# EAGLE board mbhp_dio_matrix (EAGLE 6.2)
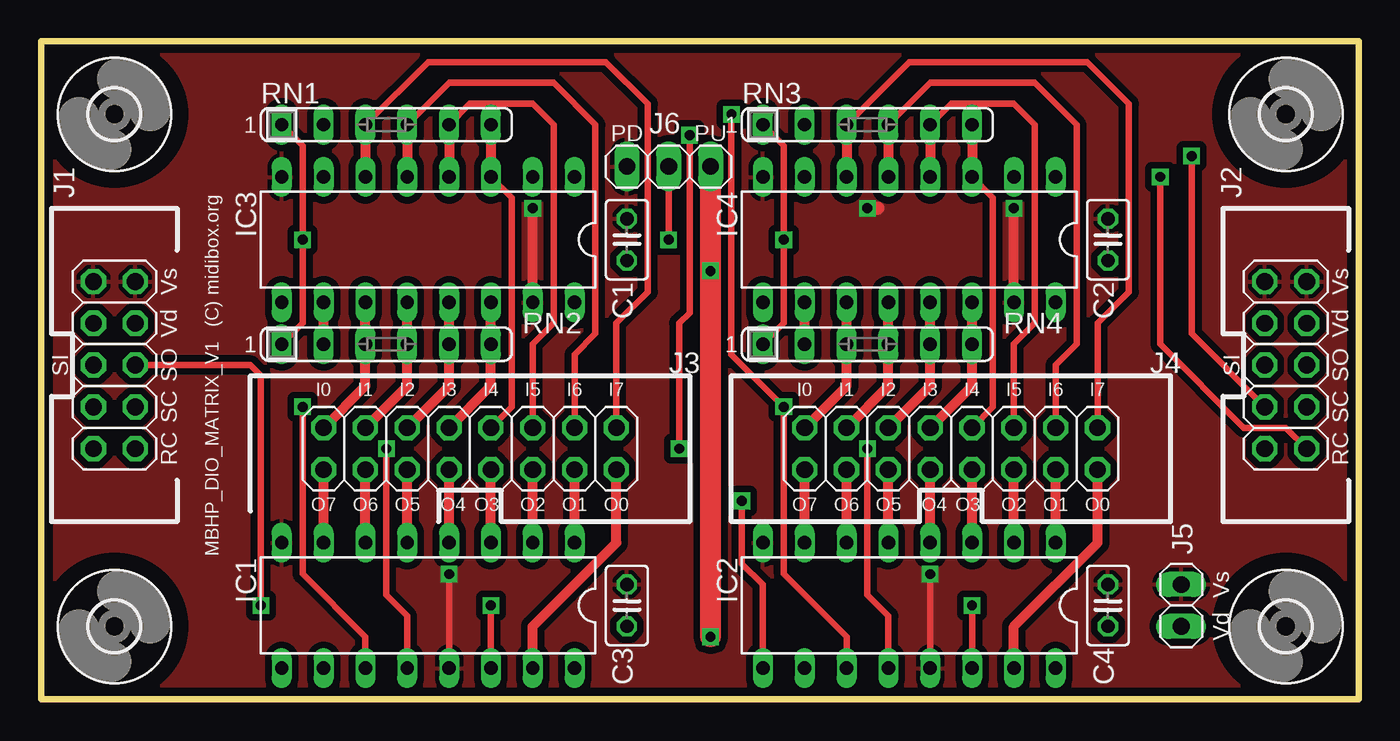
[diagram p0: board, top side]
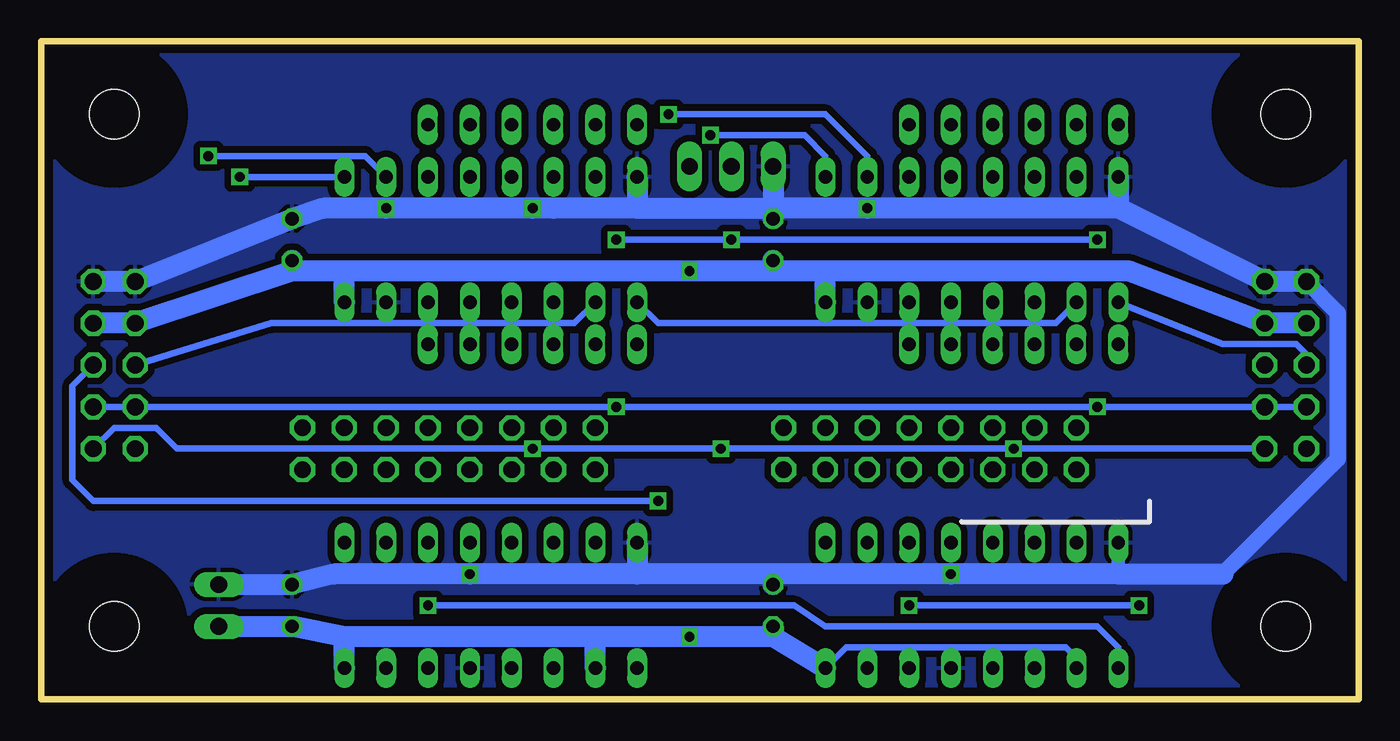
[diagram p1: board, bottom side, seen from below]

Size 80 x 40 mm. Coordinates in mm from the lower left corner, seen from the top.
Outline: 0,0 0,40 80,40 80,0 0,0
Copper layers (1*16): Top 0.035mm / dielectric 1.5mm / Bottom 0.035mm
Design rules: minimum track width 8mil, minimum drill 0.6mm, track to track 8mil, track to pad 8mil, pad to pad 8mil, via to via 8mil, smd to smd 0mil, copper to edge 20mil, drill to drill 10mil, minimum pad ring 8mil, minimum via ring 8mil, stop-mask expansion 0mil, vias tented up to drill 0mil, thermal gap 10mil

## Footprints (pad centres in the part's own frame; a part is rotated, then mirrored left to right if it is on the bottom)
C025-025X050 = drill 0.813 octagon: 1 -1.27,0; 2 1.27,0
3,0 = hole 3: 0,0
DIL16 = drill 0.813 long: 1 -8.89,-3.81; 2 -6.35,-3.81; 3 -3.81,-3.81; 4 -1.27,-3.81; 5 1.27,-3.81; 6 3.81,-3.81; 7 6.35,-3.81; 8 8.89,-3.81; 9 8.89,3.81; 10 6.35,3.81; 11 3.81,3.81; 12 1.27,3.81; 13 -1.27,3.81; 14 -3.81,3.81; 15 -6.35,3.81; 16 -8.89,3.81
2X05 = drill 1.016 octagon: 1 -5.08,-1.27; 2 -5.08,1.27; 3 -2.54,-1.27; 4 -2.54,1.27; 5 0,-1.27; 6 0,1.27; 7 2.54,-1.27; 8 2.54,1.27; 9 5.08,-1.27; 10 5.08,1.27
2X08 = drill 1.016 octagon: 1 -8.89,-1.27; 2 -8.89,1.27; 3 -6.35,-1.27; 4 -6.35,1.27; 5 -3.81,-1.27; 6 -3.81,1.27; 7 -1.27,-1.27; 8 -1.27,1.27; 9 1.27,-1.27; 10 1.27,1.27; 11 3.81,-1.27; 12 3.81,1.27; 13 6.35,-1.27; 14 6.35,1.27; 15 8.89,-1.27; 16 8.89,1.27
1X02 = drill 1.016 long: 1 -1.27,0; 2 1.27,0
1X03 = drill 1.016 long: 1 -2.54,0; 2 0,0; 3 2.54,0
SIL6 = drill 0.813 long: 1 -6.35,0; 2 -3.81,0; 3 -1.27,0; 4 1.27,0; 5 3.81,0; 6 6.35,0

## Placement (x,y rotation side)
C1  100nF  [C025-025X050]  35.56,27.94 90 top
C2  100nF  [C025-025X050]  64.77,27.94 90 top
C3  100nF  [C025-025X050]  35.56,5.71 90 top
C4  100nF  [C025-025X050]  64.77,5.71 90 top
E$1  [3,0]  4.45,35.56 0 top
E$2  [3,0]  75.56,35.56 0 top
E$3  [3,0]  75.56,4.45 0 top
E$4  [3,0]  4.45,4.45 0 top
IC1  74HC595  [DIL16]  23.5,5.71 180 top
IC2  74HC595  [DIL16]  52.7,5.71 180 top
IC3  74HC165  [DIL16]  23.5,27.94 180 top
IC4  74HC165  [DIL16]  52.7,27.94 180 top
J1  [2X05]  4.45,20.32 270 top
J2  [2X05]  75.56,20.32 270 top
J3  [2X08]  26.04,15.24 0 top
J4  [2X08]  55.24,15.24 0 top
J5  [1X02]  69.22,5.71 90 top
J6  [1X03]  38.1,32.38 180 top
RN1  5x10k  [SIL6]  20.95,34.92 0 top
RN2  5x10k  [SIL6]  20.95,21.59 0 top
RN3  5x10k  [SIL6]  50.16,34.92 0 top
RN4  5x10k  [SIL6]  50.16,21.59 0 top

## Library data of the parts
C1-C4 = resistor
E$1-E$4 = holes
IC1-IC4 = 74xx-eu
J1-J6 = pinhead
RN1-RN4 = resistor-sil

## Nets
GND: C1.2 C2.2 C3.2 C4.2 IC1.8 IC1.13 IC2.8 IC2.13 IC3.8 IC3.15 IC4.8 IC4.15 J1.1 J1.2 J2.1 J2.2 J5.2 J6.3
RC: IC1.12 IC2.12 IC3.1 IC4.1 J1.10 J2.10
S$1: J6.2 RN1.1 RN2.1 RN3.1 RN4.1
S$2: IC1.9 IC2.14
S$3: IC3.11 J3.2 RN2.3
S$4: IC3.12 J3.4 RN2.4
S$5: IC3.13 J3.6 RN2.5
S$6: IC3.14 J3.8 RN2.6
S$7: IC3.3 J3.10 RN1.6
S$8: IC3.4 J3.12 RN1.5
S$9: IC3.5 J3.14 RN1.4
S$10: IC3.6 J3.16 RN1.3
S$11: IC4.11 J4.2 RN4.3
S$12: IC4.12 J4.4 RN4.4
S$13: IC4.13 J4.6 RN4.5
S$14: IC4.14 J4.8 RN4.6
S$15: IC4.3 J4.10 RN3.6
S$16: IC4.4 J4.12 RN3.5
S$17: IC4.5 J4.14 RN3.4
S$18: IC4.6 J4.16 RN3.3
S$19: IC3.10 IC4.9 RN2.2
S$20: IC4.10 J2.5 RN4.2
S$24: IC1.7 J3.1
S$25: IC1.6 J3.3
S$26: IC1.5 J3.5
S$27: IC1.4 J3.7
S$28: IC1.3 J3.9
S$29: IC1.2 J3.11
S$30: IC1.1 J3.13
S$31: IC1.15 J3.15
S$32: IC2.7 J4.1
S$33: IC2.6 J4.3
S$34: IC2.5 J4.5
S$35: IC2.4 J4.7
S$36: IC2.3 J4.9
S$37: IC2.2 J4.11
S$38: IC2.1 J4.13
S$39: IC2.15 J4.15
S$42: IC2.9 J2.6
SC: IC1.11 IC2.11 IC3.2 IC4.2 J1.7 J1.8 J2.7 J2.8
SI: IC3.9 J1.5
SO: IC1.14 J1.6
VDD: C1.1 C2.1 C3.1 C4.1 IC1.10 IC1.16 IC2.10 IC2.16 IC3.16 IC4.16 J1.3 J1.4 J2.3 J2.4 J5.1 J6.1

## Tracks (layer width: path | path; a pad name or v marks a point on that pad's centre or on a via)
GND  (via drill 0.6)
  Top 0.406: IC1.13 v24.77,7.62 | IC2.13 v53.98,7.62
  Top 0.61: IC3.15 v29.84,29.84 | IC4.15 v59.05,29.84
  Top 0.813: v50.16,29.84 50.8,29.84
  Bottom 0.813: IC1.8 14.61,7.62
  Bottom 1.016: J1.1 1.27,23.5 1.27,14.61 8.26,7.62
  Bottom 1.27: J1.1 J1.2 14.61,29.84 | IC3.8 14.61,29.84 | 14.61,29.84 v29.84,29.84 35.56,29.84 | J2.2 J2.1 C2.2 62.87,29.84 v59.05,29.84 v50.16,29.84 48.9,29.84 43.81,29.84 | J6.3 C1.2 35.56,29.84 | 43.81,29.84 35.56,29.84 | 35.56,7.62 v24.77,7.62 14.61,7.62 8.26,7.62 | C3.2 35.56,7.62 | 35.56,7.62 43.81,7.62 | IC2.8 43.81,7.62 | 43.81,7.62 v53.98,7.62 62.23,7.62 C4.2 J5.2 | IC4.8 43.81,29.84
  pour Top (isolate 0.406): 0,40 80,40 80,0 0,0
  pour Bottom (isolate 0.406): 0,40 80,40 80,0 0,0
RC  (via drill 0.6)
  Top 0.406: IC1.12 22.23,5.08 20.95,6.35 v20.95,15.24 | IC2.12 51.44,5.08 50.16,6.35 v50.16,15.24 | v39.37,34.29 39.37,23.5 38.73,22.86 v38.73,15.24 | v67.94,31.75 67.94,21.59 73.03,16.51 75.56,16.51 J2.10
  Bottom 0.406: J1.10 v20.95,15.24 v38.73,15.24 v50.16,15.24 71.75,15.24 73.03,16.51 75.56,16.51 J2.10 | IC3.1 32.38,33.02 33.66,34.29 v39.37,34.29 | IC4.1 v67.94,31.75
S$1  (via drill 0.6)
  Top 0.406: RN1.1 15.88,33.66 v15.88,27.94 15.88,22.86 RN2.1 | RN4.1 45.09,22.86 v45.09,27.94 45.09,33.66 RN3.1 | v38.1,27.94 J6.2
  Bottom 0.406: v15.88,27.94 v38.1,27.94 v45.09,27.94
S$2  (via drill 0.6)
  Top 0.406: v56.52,5.71 IC2.14
  Bottom 0.406: v56.52,5.71 34.29,5.71 32.38,4.45 15.88,4.45 14.61,3.17 IC1.9
S$3
  Top 0.61: J3.2 19.68,19.05 RN2.3 IC3.11
S$4
  Top 0.61: J3.4 22.23,19.05 RN2.4 IC3.12
S$5
  Top 0.61: J3.6 24.77,19.05 RN2.5 IC3.13
S$6
  Top 0.61: J3.8 27.3,19.05 RN2.6 IC3.14
S$7
  Top 0.406: J3.10 28.57,17.78 28.57,30.48 IC3.3
  Top 0.61: RN1.6 IC3.3
S$8
  Top 0.406: J3.12 29.84,21.59 31.11,22.86 31.11,34.92 29.84,36.2 26.04,36.2 RN1.5
  Top 0.61: RN1.5 IC3.4
S$9
  Top 0.406: J3.14 32.38,20.95 33.66,22.23 33.66,34.92 31.11,37.47 24.77,37.47 RN1.4
  Top 0.61: RN1.4 IC3.5
S$10
  Top 0.406: J3.16 34.92,22.86 36.83,24.77 36.83,36.2 34.29,38.73 23.5,38.73 RN1.3
  Top 0.61: RN1.3 IC3.6
S$11
  Top 0.61: J4.2 48.9,19.05 RN4.3 IC4.11
S$12
  Top 0.61: J4.4 51.44,19.05 RN4.4 IC4.12
S$13
  Top 0.61: J4.6 53.98,19.05 RN4.5 IC4.13
S$14
  Top 0.61: J4.8 56.52,19.05 RN4.6 IC4.14
S$15
  Top 0.406: J4.10 57.78,17.78 57.78,30.48 IC4.3
  Top 0.61: RN3.6 IC4.3
S$16
  Top 0.406: J4.12 59.05,21.59 60.33,22.86 60.33,34.92 59.05,36.2 55.24,36.2 RN3.5
  Top 0.61: RN3.5 IC4.4
S$17
  Top 0.406: J4.14 61.59,20.32 62.87,21.59 62.87,34.92 60.33,37.47 53.98,37.47 RN3.4
  Top 0.61: RN3.4 IC4.5
S$18
  Top 0.406: J4.16 64.14,22.86 66.04,24.77 66.04,36.2 63.5,38.73 52.7,38.73 RN3.3
  Top 0.61: RN3.3 IC4.6
S$19
  Top 0.61: RN2.2 IC3.10
  Bottom 0.406: IC4.9 42.55,22.86 18.41,22.86 IC3.10
S$20
  Top 0.61: RN4.2 IC4.10
  Bottom 0.406: J2.5 66.04,22.86 47.62,22.86 IC4.10
S$24
  Top 0.61: IC1.7 J3.1
S$25
  Top 0.61: IC1.6 J3.3
S$26
  Top 0.61: IC1.5 J3.5
S$27
  Top 0.61: IC1.4 J3.7
S$28
  Top 0.61: IC1.3 J3.9
S$29
  Top 0.61: IC1.2 J3.11
S$30
  Top 0.61: IC1.1 J3.13
S$31
  Top 0.61: IC1.15 29.84,4.45 34.92,9.53 J3.15
S$32
  Top 0.61: IC2.7 J4.1
S$33
  Top 0.61: IC2.6 J4.3
S$34
  Top 0.61: IC2.5 J4.5
S$35
  Top 0.61: IC2.4 J4.7
S$36
  Top 0.61: IC2.3 J4.9
S$37
  Top 0.61: IC2.2 J4.11
S$38
  Top 0.61: IC2.1 J4.13
S$39
  Top 0.61: IC2.15 59.05,4.45 64.14,9.53 J4.15
S$42  (via drill 0.6)
  Top 0.406: IC2.9 43.81,6.99 42.55,8.26 v42.55,12.06
  Bottom 0.406: v42.55,12.06 76.83,12.06 78.11,13.34 78.11,19.05 J2.6
SC  (via drill 0.6)
  Top 0.406: IC1.11 19.68,3.81 15.88,7.62 v15.88,17.78 | IC2.11 48.9,3.81 45.09,7.62 v45.09,17.78 41.91,20.95 v41.91,35.56 | v69.85,33.02 69.85,22.23 J2.7
  Bottom 0.406: J2.8 J2.7 v45.09,17.78 v15.88,17.78 J1.8 J1.7 | IC3.2 29.84,33.02 32.38,35.56 v41.91,35.56 | IC4.2 60.33,33.02 v69.85,33.02
SI
  Bottom 0.406: J1.5 3.17,20.95 3.81,21.59 8.26,21.59 IC3.9
SO  (via drill 0.6)
  Top 0.406: IC1.14 v27.3,5.71 | v13.34,5.71 13.34,19.68 12.7,20.32 J1.6
  Bottom 0.406: v27.3,5.71 v13.34,5.71
VDD  (via drill 0.6)
  Top 1.27: v40.64,3.81 v40.64,26.04 J6.1
  Bottom 0.406: IC1.10 17.14,2.54 17.78,3.17 31.11,3.17 IC1.16
  Bottom 1.27: J1.3 J1.4 13.97,26.04 32.38,26.04 | 32.38,26.04 35.56,26.04 | C1.1 35.56,26.04 | 35.56,26.04 v40.64,26.04 61.59,26.04 | 61.59,26.04 64.77,26.04 | C2.1 64.77,26.04 | 64.77,26.04 J2.3 J2.4 | IC4.16 61.59,26.04 | IC3.16 32.38,26.04 | 46.35,3.81 v40.64,3.81 35.56,3.81 | 46.35,3.81 61.59,3.81 | 61.59,3.81 C4.1 J5.1 | IC2.10 46.35,3.81 | IC2.16 61.59,3.81 | IC1.16 35.56,3.81 | C3.1 35.56,3.81

## Text on the board
tNames: PD | PU | (C) midibox.org | Vs | Vs | Vd | Vd | SI | SO | SI | SO | SC | I0 | I1 | I2 | I3 | I4 | I5 | I6 | I7 | I0 | I1 | I2 | I3 | I4 | I5 | I6 | I7 | SC | RC | MBHP_DIO_MATRIX_V1 | RC | O7 | O6 | O5 | O4 | O3 | O2 | O1 | O0 | O7 | O6 | O5 | O4 | O3 | O2 | O1 | O0 | Vs | Vd